# Altium PCB main.PcbDoc
Units mil, origin at the board's own origin, x right, y up, seen from the top; angles counter-clockwise.
Board outline 11635 x 6485 mil, 2 copper layers (Top Layer, Bottom Layer); 48 components, 57 nets, 241 pads, 11 vias.
Unrouted connection lines stored in the file: 5.
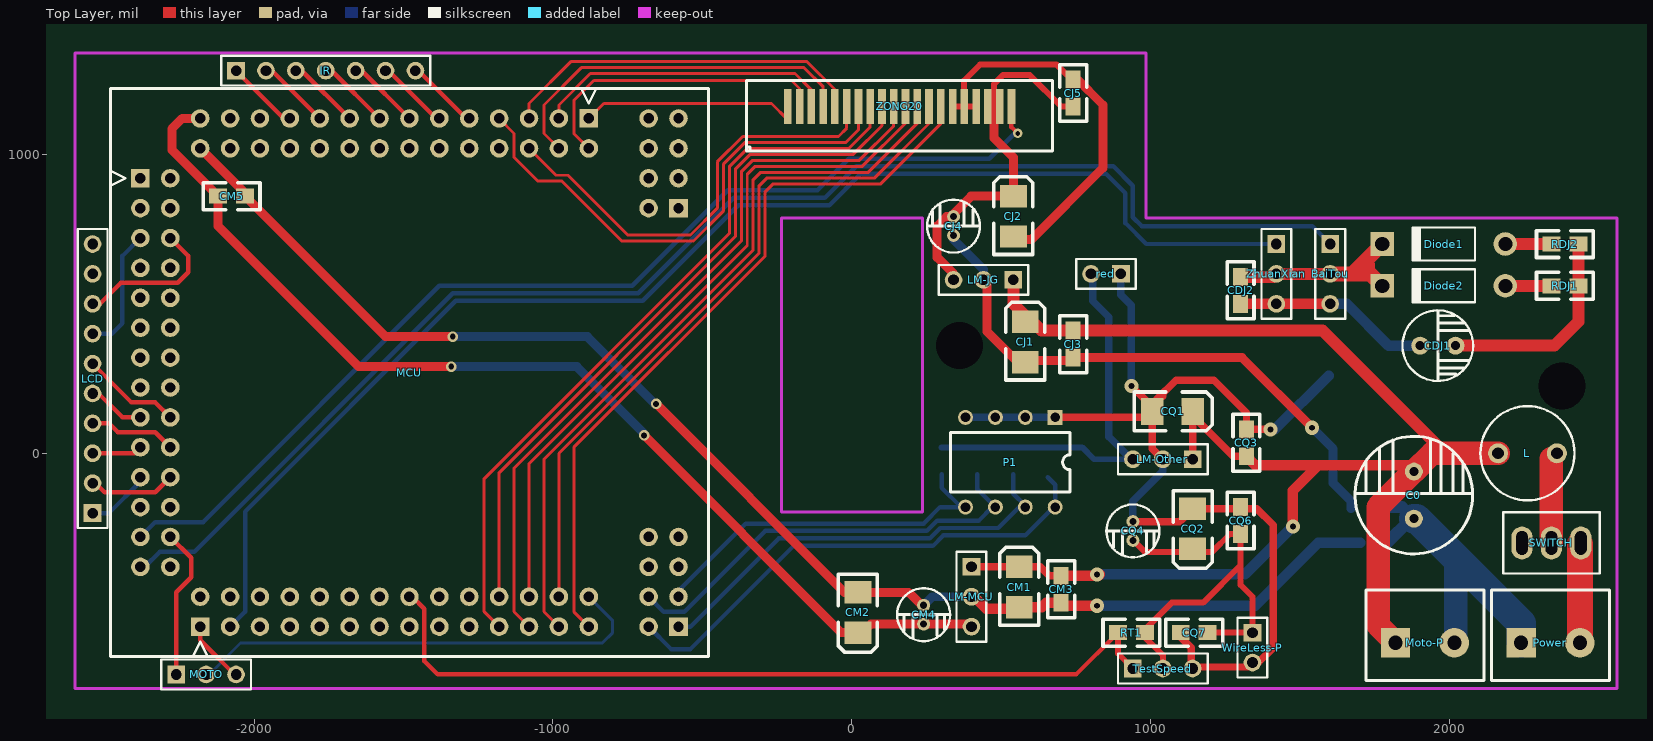
[diagram p0: Top Layer view]
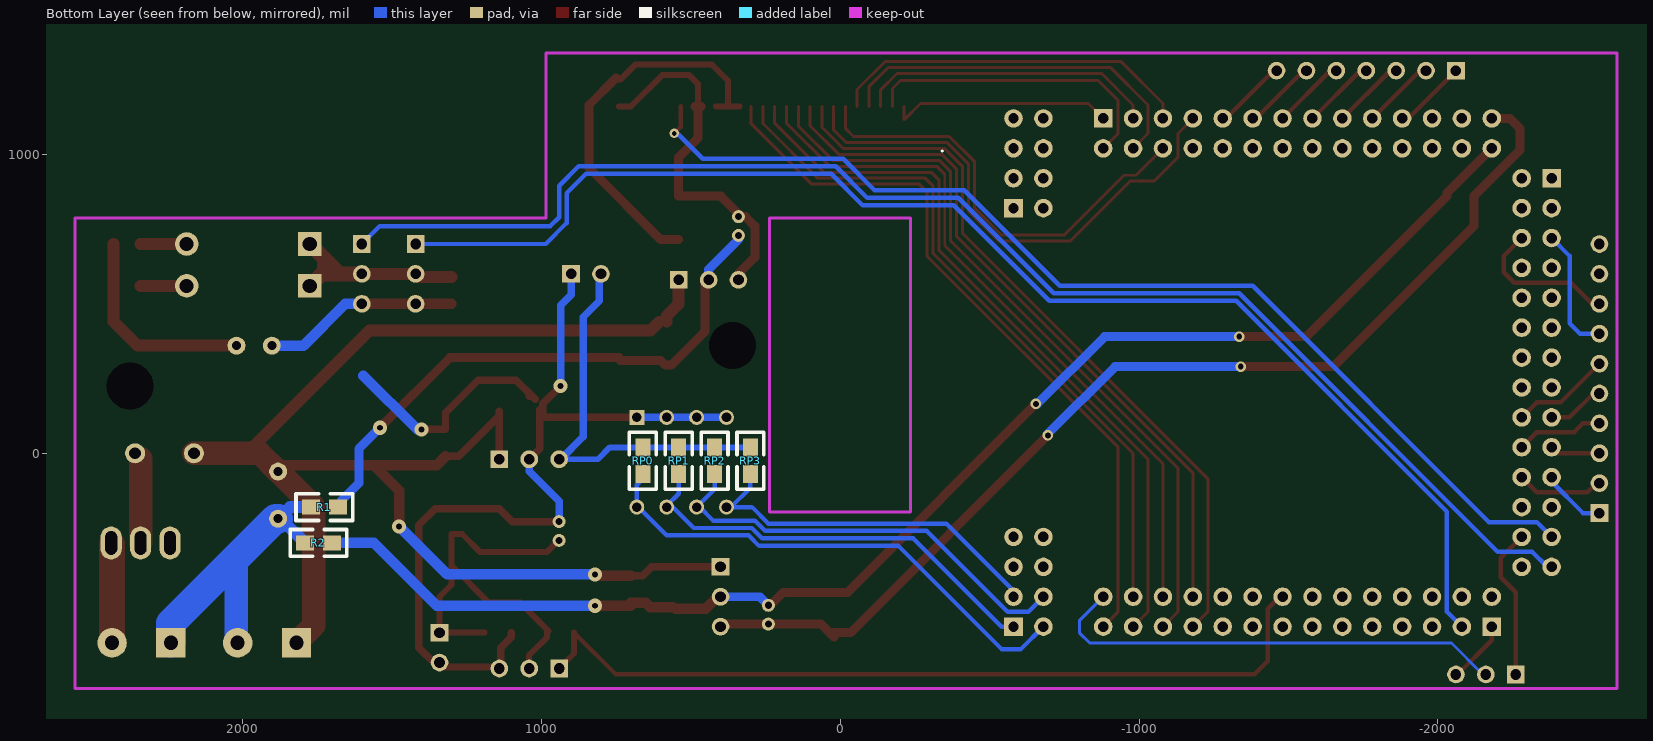
[diagram p1: Bottom Layer view, seen from below]

## Layer stack, top to bottom
Top Layer: signal copper 1.4
Dielectric: dielectric 12.6, FR-4, Dk 4.8
Bottom Layer: signal copper 1.4

## Board outline
-4810,-3285 6730,-3285 6765,-3250 6570,-3055 6570,3130 -4800,3130 -4870,3200

## Design rules (kind name [scope] priority, off if disabled: settings)
Clearance [All] p1: gap=10
ComponentClearance [All] p1 off: gap=10 collisioncheckmode=3 verticalgap=10
PolygonConnect [All] p1: connectstyle=Relief reliefconductorwidth=10 reliefentries=4 polygonreliefangle="90 Angle"
RoutingVias [All] p1: holewidth=28 width=50 viastyle="Through Hole" minholewidth=11.81 minwidth=19.68 maxholewidth=28 maxwidth=50
SolderMaskExpansion [All] p1: expansion=4
TestPointUsage [All] p1: valid=0 allowmultiple=FALSE
Testpoint [All] p1: side=15 testpointundercomponent=TRUE minsize=40 maxsize=100 preferedsize=60 minholesize=0 maxholesize=40 preferedholesize=32 testpointgrid=1 style=1023 order=0123456789
Width [All] p1: maxlimit=98.43 minlimit=10 preferedwidth=10 minimp=50.000000 maximp=50.000000 favimp=50.000000
18 further rules are at their usual default settings.

## Classes and differential pairs
component class MCU: MCU

## Components (designator, comment, footprint, x,y, rotation, side; value= is the part's Value field where it differs from the comment)
BaiTou "激光摆头舵机接口" HDR1X3 1600,700 r270 top
C0 "BATT" 1000UF 1880,-140 r270 top
CDJ1 "100uF" 100UF 1960,360 r180 top
CDJ2 "Cap" 0805 1300,500 r90 top
CJ1 "Cap Pol3" 3528 580,440 r90 top
CJ2 "47uF" 3528 540,860 r90 top
CJ3 "Cap" 0805 740,320 r90 top
CJ4 "47uF" 47UF 340,760 r270 top
CJ5 "Cap" 0805 740,1160 r90 top
CM1 "Cap Pol3" 3528 560,-380 r90 top
CM2 "47uF" 3528 20,-600 r270 top
CM3 "Cap" 0805 700,-500 r90 top
CM4 "47uF" 47UF 240,-540 r90 top
CM5 "Cap" 0805 -2120,860 r0 top
CQ1 "Cap Pol3" 3528 1140,140 r0 top
CQ2 "47uF" 3528 1140,-320 r270 top
CQ3 "Cap" 0805 1320,80 r270 top
CQ4 "47uF" 47UF 940,-260 r90 top
CQ6 "Cap" 0805 1300,-180 r270 top
CQ7 "Cap" 0805 1100,-600 r0 top
Diode1 "Diode 1N4001" DO-41 1980,700 r180 top
Diode2 "Diode 1N4001" DO-41 1980,560 r180 top
IR "红外模块接口" HDR1X7 -2060,1280 r0 top
L "Res1" 10UH 2260,0 r0 top
LCD "LCD显示接口" HDR1X10 -2540,-200 r90 top
LM-JG "激光供电模块" HDR1X3 540,580 r180 top
LM-MCU "单片机供电模块" HDR1X3 400,-380 r270 top
LM-Other "其他供电模块" HDR1X3 1140,-20 r180 top
MCU "龙丘单片机" LQ_112_BOARD -2380,920 r0 top
MOTO "电机模块" HDR1X3 -2260,-740 r0 top
Moto-P "电机电源" tongzhu 1720,-760 r0 top
P1 "Header 4X2A" DIP8 680,120 r270 top
Power "电源" tongzhu 2140,-760 r0 top
R1 "0欧姆" 0805 1680,-180 r0 bottom
R2 "0欧姆" 0805 1700,-300 r0 bottom
RDJ1 "6欧姆" 0805 2340,560 r0 top
RDJ2 "6欧姆" 0805 2340,700 r0 top
red "Header 2" HDR1X2 900,600 r180 top
RP0 "Res2" 0805 660,20 r270 bottom
RP1 "Res2" 0805 540,20 r270 bottom
RP2 "Res2" 0805 420,20 r270 bottom
RP3 "Res2" 0805 300,20 r270 bottom
RT1 "测速电阻" 0805 980,-600 r180 top
SWITCH "SWITCH" SWITCH 2340,-300 r180 top
TestSpeed "测速模块" HDR1X3 940,-720 r0 top
WireLess-P "无线电源模块" HDR1X2 1340,-600 r270 top
ZhuanXian "摆角舵机" HDR1X3 1420,700 r270 top
ZONG20 "Header 20" ZONG20 140,1160 r0 top

## Footprints (in the part's own frame and the unit in brackets; to place one, negate y for a bottom-side part, rotate by r counter-clockwise, add the part's x,y. Pads: shape width x height; smd on the part's side, far side on the other; paste and mask are expansions set on the pad)
10UH [mm]
  round 1.7 hole 1: 1(-2.5,0) 2(2.5,0)
  silkscreen extent -4,-4 4,4
47UF [mm]
  round 1.1 hole 0.6: 1(-0.8,0) 2(0.8,0)
  silkscreen extent -2.25,-2.25 2.25,2.25
100UF [mil]
  round 60 hole 30: 1(-59.06,0) 2(59.06,0)
  silkscreen extent -118,-118 118,118
0805 [mil]
  rect 60x50 smd: 1(0,0) 2(90,0)
  silkscreen extent -50,-45 140,45
1000UF [mil]
  round 60 hole 30: 1(-78.74,0) 2(78.74,0)
  silkscreen extent -197,-197 197,197
3528 [mil]
  rect 75x90 smd: 1(0,0) 2(-135,0)
  silkscreen extent -195,-65 65,65
DIP8 [mil]
  rect 50x50 hole 32: 1(0,0)
  round 50 hole 32: 2(0,-100) 3(0,-200) 4(0,-300) 5(300,-300) 6(300,-200) 7(300,-100) 8(300,0)
  silkscreen extent 50,-350 250,50
DO-41 [mm] "Diode, Axial; Body 5.2 x 2.7 mm (LxDia. max), Lead Dia. 0.86 mm (max)"
  round 2 hole 1.2: 1(-5.23,0)
  rect 2x2 hole 1.2: 2(5.23,0)
  silkscreen extent -2.65,-1.41 2.75,1.4
HDR1X2 [mm] "Connector; Header; 2 Position"
  rect 1.5x1.5 hole 0.9: 1(0,0)
  round 1.5 hole 0.9: 2(2.54,0)
  silkscreen extent -1.27,-1.27 3.81,1.27
HDR1X3 [mm] "Connector; Header; 3 Position"
  rect 1.5x1.5 hole 0.9: 1(0,0)
  round 1.5 hole 0.9: 2(2.54,0) 3(5.08,0)
  silkscreen extent -1.27,-1.27 6.35,1.27
HDR1X7 [mm] "Connector; Header; 7 Position"
  rect 1.5x1.5 hole 0.9: 1(0,0)
  round 1.5 hole 0.9: 2(2.54,0) 3(5.08,0) 4(7.62,0) 5(10.16,0) 6(12.7,0) 7(15.24,0)
  silkscreen extent -1.27,-1.27 16.51,1.27
HDR1X10 [mm] "Connector; Header; 10 Position"
  rect 1.5x1.5 hole 0.9: 1(0,0)
  round 1.5 hole 0.9: 2(2.54,0) 3(5.08,0) 4(7.62,0) 5(10.16,0) 6(12.7,0) 7(15.24,0) 8(17.78,0) 9(20.32,0) 10(22.86,0)
  silkscreen extent -1.27,-1.27 24.13,1.27
LQ_112_BOARD [mil]
  rect 62x62 hole 35: 101(200,-1500) 201(0,0) 301(1500,200) 401(1800,-1500) 501(1800,-100)
  round 62 hole 35: 102(200,-1400) 103(300,-1500) 104(300,-1400) 105(400,-1500) 106(400,-1400) 107(500,-1500) 108(500,-1400) 109(600,-1500) 110(600,-1400) 111(700,-1500) 112(700,-1400) 113(800,-1500) 114(800,-1400) 115(900,-1500) 116(900,-1400) 117(1000,-1500) 118(1000,-1400) 119(1100,-1500) 120(1100,-1400) 121(1200,-1500) 122(1200,-1400) 123(1300,-1500) 124(1300,-1400) 125(1400,-1500) 126(1400,-1400) 127(1500,-1500) 128(1500,-1400) 202(100,0) 203(0,-100) 204(100,-100) 205(0,-200) 206(100,-200) 207(0,-300) 208(100,-300) 209(0,-400) 210(100,-400) 211(0,-500) 212(100,-500) 213(0,-600) 214(100,-600) 215(0,-700) 216(100,-700) 217(0,-800) 218(100,-800) 219(0,-900) 220(100,-900) 221(0,-1000) 222(100,-1000) 223(0,-1100) 224(100,-1100) 225(0,-1200) 226(100,-1200) 227(0,-1300) 228(100,-1300) 302(1500,100) 303(1400,200) 304(1400,100) 305(1300,200) 306(1300,100) 307(1200,200) 308(1200,100) 309(1100,200) 310(1100,100) 311(1000,200) 312(1000,100) 313(900,200) 314(900,100) 315(800,200) 316(800,100) 317(700,200) 318(700,100) 319(600,200) 320(600,100) 321(500,200) 322(500,100) 323(400,200) 324(400,100) 325(300,200) 326(300,100) 327(200,200) 328(200,100) 402(1700,-1500) 403(1800,-1400) 404(1700,-1400) 405(1800,-1300) 406(1700,-1300) 407(1800,-1200) 408(1700,-1200) 502(1700,-100) 503(1800,0) 504(1700,0) 505(1800,100) 506(1700,100) 507(1800,200) 508(1700,200)
  silkscreen extent -100,-1600 1900,300
SWITCH [mm]
  oval 1.8x2.8 hole 1 slot 2 at 90 deg: 1(-2.5,0) 2(0,0) 3(2.5,0)
  silkscreen extent -4.1,-2.6 4.1,2.6
tongzhu [mm]
  rect 2.5x2.5 hole 1.2: 1(2.5,3.2)
  round 2.5 hole 1.2: 2(7.5,3.2)
  silkscreen extent 0,0 10,7.7
ZONG20 [mm]
  rect 0.65x3 smd: 1(-9,0) 2(-8,0) 3(-7,0) 4(-6,0) 5(-5,0) 6(-4,0) 7(-3,0) 8(-2,0) 9(-1,0) 10(0,0) 11(1,0) 12(2,0) 13(3,0) 14(4,0) 15(5,0) 16(6,0) 17(7,0) 18(8,0) 19(9,0) 20(10,0)
  silkscreen extent -12.5,-3.8 13.5,2.2

## Part data
BaiTou LM-JG LM-MCU LM-Other MOTO SWITCH TestSpeed ZhuanXian: library part "Header 3", "Header, 3-Pin"
C0: library part "Cap Pol3", "Polarized Capacitor (Surface Mount)"
CDJ1 CJ2 CJ4 CM2 CM4 CQ2 CQ4: library part "Cap Pol1", "Polarized Capacitor (Radial)"
CDJ2 CJ3 CJ5 CM3 CM5 CQ3 CQ6 CQ7: "Capacitor"
CJ1 CM1 CQ1: "Polarized Capacitor (Surface Mount)"
Diode1 Diode2: "1 Amp General Purpose Rectifier"
IR: library part "Header 7", "Header, 7-Pin"
L RP0 RP1 RP2 RP3: "Resistor"
LCD: library part "Header 10", "Header, 10-Pin"
MCU: library part LQ_112_BOARD, "LQ_112_BOARD"
Moto-P Power WireLess-P: library part "Header 2", "Header, 2-Pin"
P1: "Header, 4-Pin, Dual row"
R1 R2 RDJ1 RDJ2 RT1: library part Res2, "Resistor"
red: "Header, 2-Pin"
ZONG20: "传感下来引脚"

## Free pads (board coordinates)
  round 0 hole 157.48: 0(2375,225) 1(360,360)

## Via types
v1: diameter 47.24, hole 19.68, Top Layer to Bottom Layer, 6 vias
v2: diameter 35.43, hole 19.68, Top Layer to Bottom Layer, 4 vias
v3: diameter 31.5, hole 15.75, Top Layer to Bottom Layer, 1 vias

## Nets (pads, with @x,y where several pads share a name; then routed paths per layer and width w, separated by ;. In a path a pad name is that pad's centre, name@x,y a point inside that pad or via, vN(x,y) a via of type N, cw(c..) or ccw(c..) an arc to the next point about the centre after c; other vN are vias at no path point)
0: IR.7 MCU.309 | length 236.3
  Top Layer w15: IR.7 -1450,1280 MCU.309@-1290,1120
1: IR.6 MCU.311 | length 236.3
  Top Layer w15: IR.6 -1550,1280 MCU.311@-1390,1120
2: IR.5 MCU.313 | length 246.3
  Top Layer w15: IR.5 -1640,1280 MCU.313
3: IR.4 MCU.315 | length 246.3
  Top Layer w15: IR.4 -1740,1280 MCU.315
4: IR.3 MCU.317 | length 246.3
  Top Layer w15: IR.3 -1840,1280 MCU.317
5: IR.2 MCU.319 | length 246.3
  Top Layer w15: IR.2 -1940,1280 MCU.319
6: IR.1 MCU.321 | length 246.3
  Top Layer w15: IR.1 -1900,1120 MCU.321
8: MCU.310
9: MCU.312
10: MCU.314
11: MCU.316
A0: MCU.301 ZONG20.1 | length 784.6
  Top Layer w10: MCU.301 -830,1170 -268.66,1170 ZONG20.1@-214.33,1115.67 ; -236.49,1137.83 ZONG20.1@-214.33,1115.67 ; ZONG20.1 ZONG20.1@-214.33,1115.67
A1: MCU.302 ZONG20.2 | length 1034.3
  Top Layer w10: MCU.302 -930,1070 -930,1180 -863.39,1246.61 -201.61,1246.61 -174.96,1219.96 ZONG20.2
A2: MCU.303 ZONG20.3 | length 1011
  Top Layer w10: MCU.303 -980,1165 -875,1270 -190,1270 -135.59,1215.59 ZONG20.3
A3: MCU.304 ZONG20.4 | length 1243.9
  Top Layer w10: MCU.304 -1030,1070 -1030,1165 -905,1290 -160,1290 -96.22,1226.22 ZONG20.4
A4: MCU.305 ZONG20.5 | length 1226.6
  Top Layer w10: MCU.305 -1080,1170 -940,1310 -150,1310 -56.85,1216.85 ZONG20.5
A5: MCU.306 ZONG20.6 | length 1494
  Top Layer w10: MCU.306 -990,930 -950,930 -750,730 -540,730 -450,820 -450,975 -365,1060 -45,1060 -17.48,1087.52 ZONG20.6
A6: MCU.307 ZONG20.7 | length 1742.5
  Top Layer w10: MCU.307 -1130,1070 -1130,990 -1050,910 -970,910 -770,710 -530,710 -430,810 -430,966.72 -356.72,1040 -20,1040 21.89,1081.89 ZONG20.7
A7: MCU.308
ALLVCC: C0.1 CDJ1.1 CJ1.1 CJ3.2 CM1.1 CM3.2 CQ1.1 CQ3.2 L.1 LM-JG.1 LM-MCU.1 LM-Other.1 Moto-P.1 RDJ1.2 RDJ2.2 | length 6089.5
  Top Layer w25: LM-MCU.1 630,-380 660,-410 CM3.2 ; CQ1.1 LM-Other.1 CQ1.1@1140,125 ; CQ3.2 1275,-10 ; CQ1.1@1140,125 1275,-10 ; CQ1.1@1140,125 1275,-10
  Top Layer w35: CM3.2 825,-410 v1@830,-405 ; CQ3.2 1350,-40 1885,-40 1895,-30 ; v1(1475,-245) 1475,-125 1560,-40 ; 1854.23,-80 1857.11,-82.89
  Top Layer w40: LM-JG.1 540,500 580,460 CJ1.1 ; CJ1.1@605,440 635,410 CJ3.2 1575,410 1970,15 ; CDJ1.1 2350,360 2430,440 RDJ2.2
  Top Layer w78.74: Moto-P.1 1760,-575.59 1760,-180 1878.74,-61.26 C0.1 1941.26,0 L.1
  Bottom Layer w35: v1(820,-405) 1315,-405 v1(1475,-245)
AVCC: L.2 SWITCH.2 | length 281.6
  Top Layer w78.74: SWITCH.2 L.2@2340,-18.43
B0: MCU.121 ZONG20.8 | length 2493.8
  Top Layer w10: MCU.121 -1230,-530 -1230,-85 -410,735 -410,958.43 -348.43,1020 -10,1020 61.26,1091.26 ZONG20.8
B1: MCU.122 ZONG20.9 | length 2372.6
  Top Layer w10: MCU.122 -1180,-65 -390,725 -390,950.15 -340.15,1000 5,1000 100.63,1095.63 ZONG20.9
B2: MCU.123 ZONG20.10 | length 2495.8
  Top Layer w10: MCU.123 -1130,-530 -1130,-50 -370,710 -370,941.86 -331.86,980 25,980 140,1095 ZONG20.10
B3: MCU.124 ZONG20.11 | length 2371.7
  Top Layer w10: MCU.124 -1080,-35 -350,695 -350,933.58 -323.58,960 35,960 179.37,1104.37 ZONG20.11
B4: MCU.125 ZONG20.12 | length 2488.8
  Top Layer w10: MCU.125 -1030,-530 -1030,-20 -330,680 -330,915 -305,940 55,940 218.74,1103.74 ZONG20.12
B5: MCU.126 ZONG20.13 | length 2363.7
  Top Layer w10: MCU.126 -980,0 -310,670 -310,895 -285,920 75,920 258.11,1103.11 ZONG20.13
B6: MCU.127 ZONG20.14 | length 2480
  Top Layer w10: MCU.127 -930,-530 -930,20 -290,660 -290,875 -265,900 95,900 297.48,1102.48 ZONG20.14
B7: MCU.128 MOTO.2 | length 1571.1
  Bottom Layer w10: MOTO.2 -2150,-740 -2045,-635 -835,-635 -800,-600 -800,-560 MCU.128
DJVCC: BaiTou.2 CDJ2.2 Diode1.2 Diode2.2 ZhuanXian.2 | length 651.2
  Top Layer w40: CDJ2.2 1410,590 ZhuanXian.2 BaiTou.2@1605,600
  Top Layer w50: BaiTou.2 1734.09,600 Diode2.2 ; 1674.09,600 Diode1.2 ; 1725,620 1725,630
GND: BaiTou.3 C0.2 CDJ1.2 CDJ2.1 CQ1.2 CQ2.2 CQ3.1 CQ4.2 CQ6.1 CQ7.1 LM-Other.2 Moto-P.2 P1.1 P1.2 P1.3 P1.4 Power.1 R1.2 R2.2 red.1 TestSpeed.3 WireLess-P.2 ZhuanXian.3 | length 6071.2
  Top Layer w25: P1.1 985,120 CQ1.2 ; red.1@895,595 red.1 ; v1(935,225) 995,165 CQ1.2@995,140 ; CQ4.2 1096.5,-228.5 CQ2.2 ; CQ1.2@1005,145 1005,15 LM-Other.2 ; CQ1.2@1020,180 1085,245 1210,245 1320,135 CQ3.1 v1(1400,80) ; 1035,190 1040,190 ; CQ7.1 1100,-615 1135,-650 TestSpeed.3@1135,-715 ; TestSpeed.3@1135,-715 1140,-715 WireLess-P.2@1325,-715 ; TestSpeed.3@1135,-715 WireLess-P.2@1325,-715 ; CQ2.2 1300,-185 1355,-185 ; CQ2.2 1355,-185 ; WireLess-P.2@1325,-715 WireLess-P.2 1360,-700 1410,-650 1410,-240 1355,-185
  Top Layer w35: CDJ2.1 BaiTou.3
  Bottom Layer w25: P1.4 P1.1 ; red.1@900,610 900,530 935,495 v1(935,225) ; CQ4.2 940,-160 1040,-60 LM-Other.2
  Bottom Layer w35: v1(1400,80) 1415,80 1595,260 ; BaiTou.3 1655,500 1795,360 CDJ1.2
  Bottom Layer w40: R1.2 1840,-180 C0.2@1878.74,-218.74 ; R2.2 1871.26,-218.74 C0.2
  Bottom Layer w78.74: Moto-P.2 2020,-629.29 2020,-345
  Bottom Layer w98.43: C0.2 C0.2@1888.74,-218.74 ; 2020,-350 C0.2@1888.74,-218.74 ; Power.1 2238.43,-568.43 C0.2@1888.74,-218.74
H4: MCU.403 P1.5 RP3.2 | length 1232.9
  Bottom Layer w15: MCU.403 -580,-460 -355,-235 240,-235 295,-180 P1.5 ; RP3.2 300,-115 P1.5@365,-180
H5: MCU.404 P1.6 RP2.2 | length 1460.5
  Bottom Layer w15: MCU.404 -630,-530 -560,-530 -290,-260 250.36,-260 285.36,-225 425,-225 470,-180 P1.6 420,-120 RP2.2
H6: MCU.401 P1.7 RP1.2 | length 1462.3
  Bottom Layer w15: MCU.401@-590,-580 -540,-580 -245,-285 260.71,-285 295.71,-250 490,-250 560,-180 P1.7 580,-175 540,-135 RP1.2
H7: MCU.402 P1.8 RP0.2 | length 1698.2
  Bottom Layer w15: MCU.402 -605,-655 -540,-655 -195,-310 271.07,-310 306.07,-275 580,-275 675,-180 P1.8 680,-105 RP0.2@655,-80
INVCC: Power.2 SWITCH.1 | length 330.9
  Top Layer w86.61: Power.2 SWITCH.1@2435.28,-303.15
JGND: CJ1.2 CJ2.2 CJ3.1 CJ4.2 CJ5.2 LM-JG.2 R1.1 ZONG20.15 ZONG20.16 ZONG20.17 | length 3374.9
  Top Layer w20: ZONG20.15 ZONG20.17 ; CJ5.2 735,1250 685,1300 428.39,1300 375,1246.61 ; 375,1246.61 375,1160 375,1246.61
  Top Layer w30: LM-JG.2@451.93,568.07 451.93,408.07 565,295 CJ1.2@575,295 ; CJ3.1@735,310 CJ1.2@600,310 ; CJ3.1 1305,320 v1(1539.51,85.49) ; CJ5.2@750,1255 840,1165 840,955 600,715 ; CJ1.2@600,310 587.5,297.5 585,295 CJ1.2@600,310 ; 600,715 540,715 600,715
  Bottom Layer w30: CJ4.2 340,715 440,615 LM-JG.2 ; v1(1539.51,85.49) 1610,15 1610,-100 1670,-160 R1.1@1670,-185
JVCC: CJ2.1 CJ4.1 CJ5.1 LM-JG.3 ZONG20.18 ZONG20.19 | length 1528.9
  Top Layer w20: CJ5.1 700,1160 595,1265 505,1265 475,1235 ; 475,1235 475,1160 475,1235
  Top Layer w30: LM-JG.3 340,600 285,655 285,760 316.5,791.5 CJ4.1 ; ZONG20.18@465,1160 ZONG20.19@485,1160 ; 398.5,860 CJ2.1 540,990 475,1055 ; 398.5,860 335,796.5 330,791.5 398.5,860 ; 475,1055 475,1160 475,1055
M0: LCD.1 MCU.221 | length 218.5
  Bottom Layer w15: LCD.1 -2485,-200 -2380,-95 MCU.221
M1: LCD.2 MCU.222 | length 293.1
  Top Layer w15: LCD.2 -2530,-100 -2500,-130 -2330,-130 MCU.222
M2: LCD.3 MCU.219 | length 168.3
  Top Layer w15: LCD.3 -2400,0 MCU.219
M3: LCD.4 MCU.220 | length 293.1
  Top Layer w15: LCD.4 -2485,100 -2455,70 -2330,70 MCU.220
M4: LCD.5 MCU.217 | length 193.1
  Top Layer w15: LCD.5 -2520,200 -2440,120 MCU.217
M5: LCD.6 MCU.218 | length 334.6
  Top Layer w15: LCD.6 -2410,170 -2330,170 MCU.218
M6: LCD.7 MCU.205 | length 424.4
  Bottom Layer w15: LCD.7 -2475,400 -2440,435 -2440,660 MCU.205
M7: LCD.8 MCU.206 | length 503.3
  Top Layer w15: LCD.8 -2515,500 -2445,570 -2255,570 -2220,605 -2220,660 MCU.206
MGND: CM1.2 CM2.2 CM3.1 CM4.2 CM5.2 LM-MCU.2 MCU.328 R2.1 | length 4644.7
  Top Layer w30: MCU.328 -2030,870 CM5.2 -1560,390 v2(-1335,390) ; v2(-655,165) -25,-465 190,-465 233.5,-508.5 CM4.2
  Top Layer w35: LM-MCU.2 410,-480 450,-520 CM1.2@550,-520 ; CM1.2 635,-515 650,-500 CM3.1 ; CM3.1@690,-500 700,-510 v1(820,-510)
  Bottom Layer w30: v2(-1335,390) -885.18,390 -660.18,165 v2(-655,165) ; CM4.2 268.5,-480 LM-MCU.2
  Bottom Layer w35: v1(820,-510) 1350,-510 1560,-300 R2.1
MVCC: CM2.1 CM4.1 CM5.1 LM-MCU.3 MCU.327 | length 3668
  Top Layer w30: MCU.327 -2240,1120 -2275,1085 -2275,1015 CM5.1 -2120,760 -1650,290 v2(-1340,290) ; v2(-695,60) -35,-600 CM2.1 ; LM-MCU.3 391.5,-571.5 CM2.1@63.5,-571.5 ; CM2.1@63.5,-571.5 27.5,-607.5 20,-615 CM2.1@63.5,-571.5
  Bottom Layer w30: v2(-1340,290) -920,290 -695,65 v2(-695,60)
NetDiode1_1: Diode1.1 RDJ2.1 | length 154.1
  Top Layer w40: Diode1.1 RDJ2.1
NetDiode2_1: Diode2.1 RDJ1.1 | length 154.1
  Top Layer w40: Diode2.1 RDJ1.1
PWM1: MCU.103 ZhuanXian.1 | length 4479.5
  Bottom Layer w15: MCU.103 -2030,-530 -2030,-195.36 -1324.64,510 -700,510 -380,830 -75,830 30,935 850,935 915,870 915,770 985,700 ZhuanXian.1
PWM3: MCU.101 MOTO.3 | length 212.6
  Top Layer w15: MCU.101 -2180,-625 -2065,-740 MOTO.3
PWM5: BaiTou.1 MCU.227 | length 4704.2
  Bottom Layer w15: MCU.227 -2365,-380 -2315,-330 -2200,-330 -1335,535 -715,535 -395,855 -90,855 15,960 875,960 940,895 940,790 970,760 1540,760 BaiTou.1
PWM6: MCU.226 MOTO.1 | length 509.7
  Top Layer w15: MCU.226 -2210,-350 -2210,-415 -2260,-465 MOTO.1
PWM7: MCU.225 ZONG20.20 | length 3593
  Top Layer w15: ZONG20.20 533.7,1091.3 v3(555,1070)
  Bottom Layer w15: MCU.225 -2330,-230 -2170,-230 -1380,560 -735,560 -415,880 -115,880 -10,985 460,985 545,1070 v3(555,1070)
QVCC: CQ2.1 CQ4.1 CQ6.2 CQ7.2 LM-Other.3 red.2 RP0.1 RP1.1 RP2.1 RP3.1 RT1.1 TestSpeed.2 WireLess-P.1 | length 3269.3
  Top Layer w20: CQ4.1 941.5,-291.5 980,-330 ; RT1.1 980,-615 1040,-675 TestSpeed.2 ; CQ7.2 WireLess-P.1 1340,-480 1300,-440 CQ6.2 ; 980,-330 1140,-330 1205,-330 ; 980,-330 1205,-330 ; 1070,-500 1175,-500 1300,-375 CQ6.2 ; 1070,-500 975,-595 1070,-500 ; 1205,-330 1265,-270 CQ6.2
  Bottom Layer w20: RP3.1 770,20 810,-20 LM-Other.3@935,-20 ; TestSpeed.2 TestSpeed.2@1050,-710
  Bottom Layer w25: red.2 805,595 805,510 860,455 860,55 935,-20 LM-Other.3
T7: MCU.116 RT1.2 TestSpeed.1 | length 2771.8
  Top Layer w15: MCU.116 -1470,-480 -1430,-520 -1430,-695 -1385,-740 750,-740 RT1.2@885,-605
  Top Layer w20: RT1.2 890,-670 TestSpeed.1
pads on no net: LCD.9 LCD.10 MCU.102 MCU.104 MCU.105 MCU.106 MCU.107 MCU.108 MCU.109 MCU.110 MCU.111 MCU.112 MCU.113 MCU.114 MCU.115 MCU.117 MCU.118 MCU.119 MCU.120 MCU.201 MCU.202 MCU.203 MCU.204 MCU.207 MCU.208 MCU.209 MCU.210 MCU.211 MCU.212 MCU.213 MCU.214 MCU.215 MCU.216 MCU.223 MCU.224 MCU.228 MCU.318 MCU.320 MCU.322 MCU.323 MCU.324 MCU.325 MCU.326 MCU.405 MCU.406 MCU.407 MCU.408 MCU.501 MCU.502 MCU.503 MCU.504 MCU.505 MCU.506 MCU.507 MCU.508 SWITCH.3

## Keep-outs
Keep-Out Layer:
  lines w10: -2598.43,-787.4 -2598.43,1338.58 -1220.47,1338.58 -196.85,1338.58 984.25,1338.58 984.25,787.4 2559.06,787.4 2559.06,-787.4 -2598.43,-787.4 ; -236.22,-196.85 236.22,-196.85 236.22,787.4 -236.22,787.4 -236.22,-196.85

## Silkscreen, mask and mechanical layers (free items; w line width, h text height)
Top Paste:
  lines w10: 5730,-3105 5730,3080 ; 6570,3130 -4800,3130 -4870,3200 -4810,-3285 6730,-3285